# EAGLE board sht11_adapter (EAGLE 8.3.1)
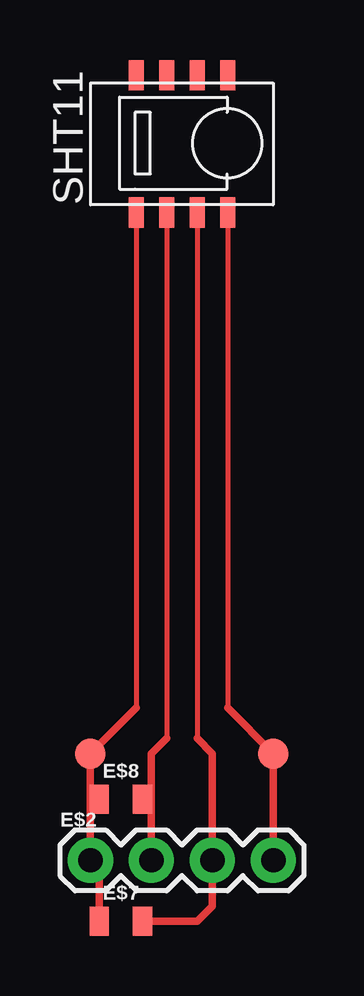
[diagram p0: board, top side]

No outline drawn. Coordinates in mm, seen from the top.
Copper layers (1*16): Top 0.035mm / dielectric 1.5mm / Bottom 0.035mm
Design rules "default": minimum track width 6mil, minimum drill 0.35mm, track to track 6mil, track to pad 6mil, pad to pad 6mil, via to via 6mil, smd to smd 6mil, copper to edge 40mil, drill to drill 6mil, minimum pad ring 10mil, minimum via ring 8mil, stop-mask expansion 4mil, vias tented up to drill 0mil, thermal gap 10mil

## Footprints (pad centres in the part's own frame; a part is rotated, then mirrored left to right if it is on the bottom)
SHT11 = smd 1.27 x 0.635: 5 7.31,2.54; 6 7.31,3.81; 7 7.31,5.08; 8 7.31,6.35; DATA 1.59,5.08; GND 1.59,6.35; SCK 1.59,3.81; VDD 1.59,2.54
1X04 = drill 1.016 pad 1.88: 1 0,0; 2 2.54,0; 3 5.08,0; 4 7.62,0
PAD.03X.05 = smd 1.27 x 1.27: P$1 0,0
0805 = smd 0.8 x 1.2: 1 -0.9,0; 2 0.9,0

## Placement (x,y rotation side)
E$1  [SHT11]  10.16,29.21 90 top
E$2  [1X04]  1.91,3.81 0 top
E$3  [PAD.03X.05]  9.53,8.26 0 top
E$4  [PAD.03X.05]  1.91,8.26 0 top
E$7  [0805]  3.17,1.27 0 top
E$8  [0805]  3.17,6.35 0 top

## Library data of the parts
E$1 = sht11
E$2-E$4 = SparkFun-Connectors
E$7 E$8 = SparkFun-Resistors

## Nets
S$1: E$1.GND E$2.1 E$7.1 E$8.1
S$2: E$1.DATA E$2.2 E$8.2
S$3: E$1.SCK E$2.3 E$7.2
S$4: E$1.VDD E$2.4

## Tracks (layer width: path | path; a pad name or v marks a point on that pad's centre or on a via)
S$1
  Top 0.203: E$1.GND 3.81,10.16
  Top 0.305: 1.91,6.32 1.91,3.87 | 1.91,6.32 1.91,8.25 | 1.91,3.87 E$2.1 | 1.91,8.26 1.91,8.25 | E$7.1 2.27,3.5 1.91,3.87 | E$8.1 1.94,6.35 1.91,6.32 | 1.91,8.25 1.91,8.26 3.81,10.16
S$2
  Top 0.203: E$1.DATA 5.08,8.89
  Top 0.305: 4.45,6.32 4.45,8.25 | 4.45,6.32 E$2.2 | 4.44,8.26 4.45,8.25 | E$8.2 4.41,6.35 4.45,6.32 | 4.45,8.25 4.45,8.26 5.08,8.89
S$3
  Top 0.203: E$1.SCK 6.35,8.89
  Top 0.305: E$7.2 6.35,1.27 6.99,1.91 E$2.3 6.99,8.26 6.35,8.89
S$4
  Top 0.203: E$1.VDD 7.62,10.16
  Top 0.305: E$2.4 9.53,8.26 7.62,10.16